# Altium PCB PCB6.PcbDoc (part 2 of 2)
Units mm, origin at the board's own origin, x right, y up, seen from the top; angles counter-clockwise.
Board outline 52.58 x 35.69 mm, 2 copper layers (Top Layer, Bottom Layer); 47 components, 153 nets, 462 pads, 249 vias.
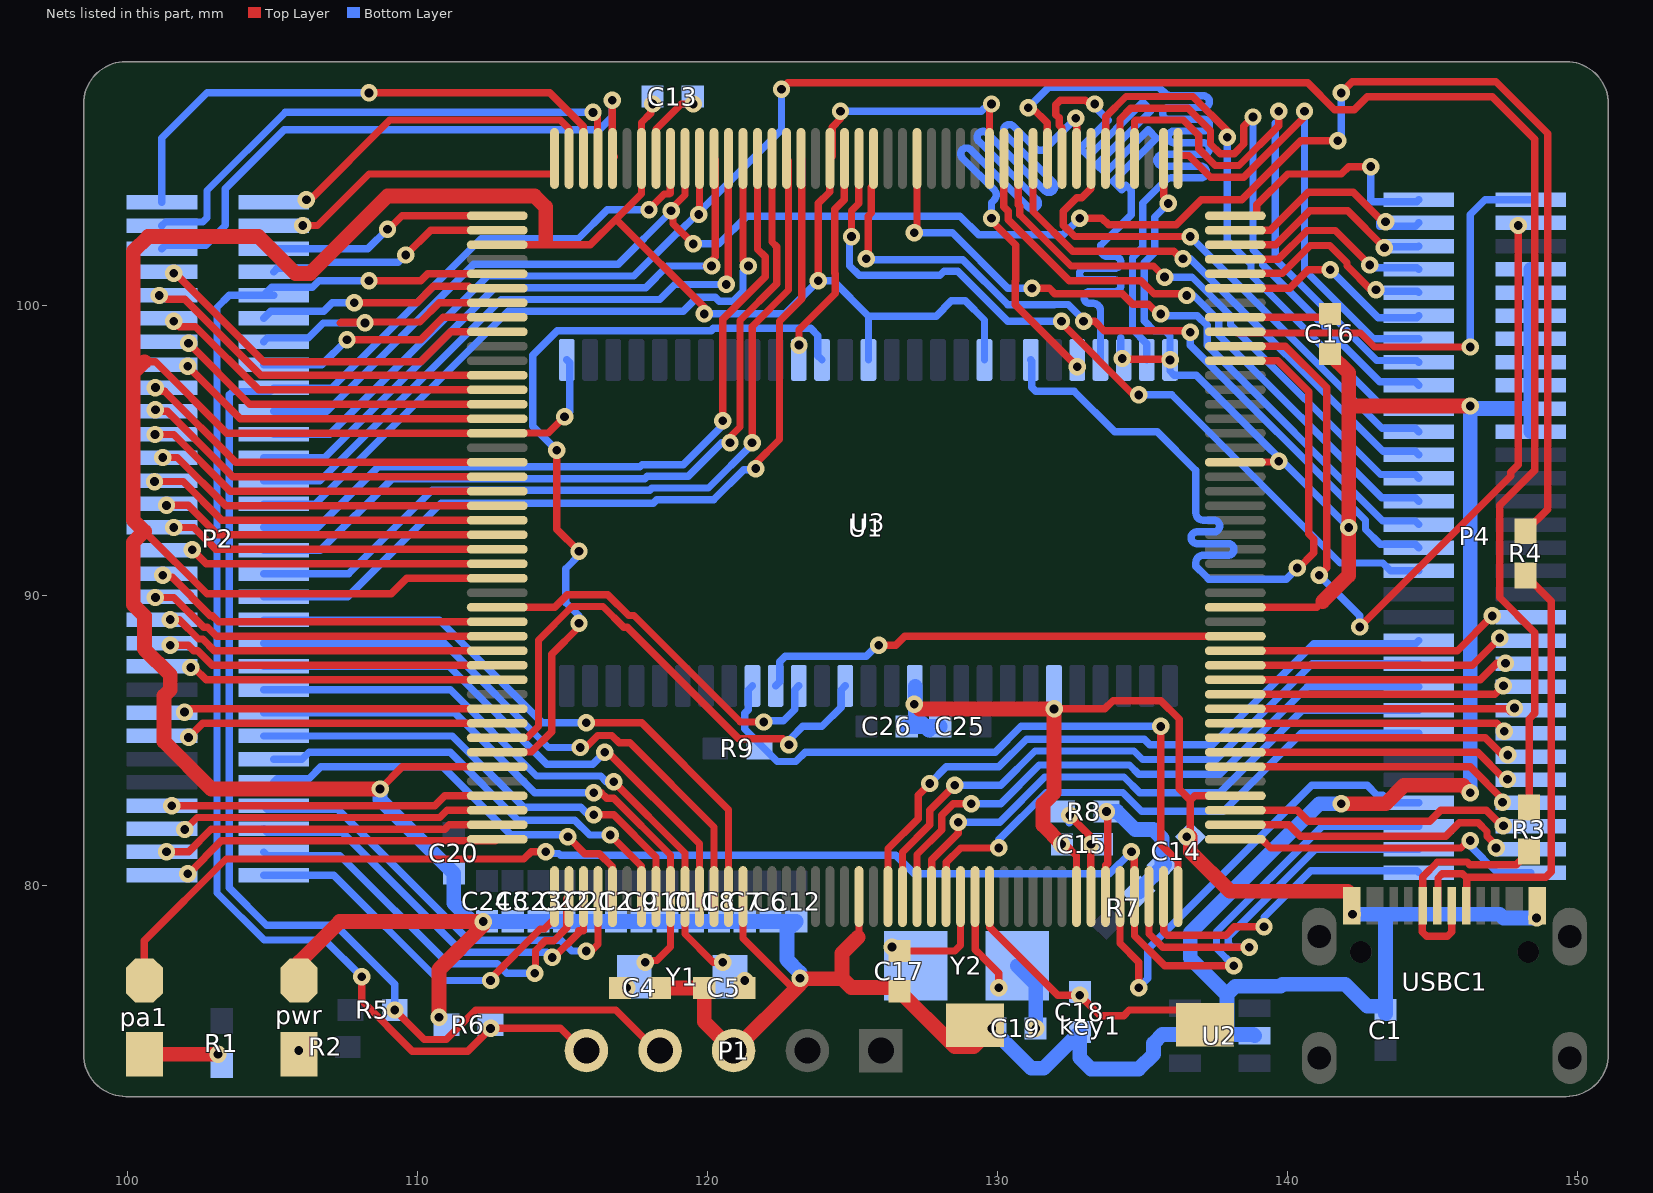
[diagram p2: the nets of this part, all layers, seen from the top]

## Via types
v1: diameter 0.6, hole 0.3, Top Layer to Bottom Layer, 249 vias

## Nets (pads, with @x,y where several pads share a name; then routed paths per layer and width w, separated by ;. In a path a pad name is that pad's centre, name@x,y a point inside that pad or via, vN(x,y) a via of type N, cw(c..) or ccw(c..) an arc to the next point about the centre after c; other vN are vias at no path point) (continued)
FMC_D12: U1.78 U3.48 | length 28.2
  Top Layer w0.254: U1.78@138.203,98.079 139.665,98.079 140.739,97.005 140.739,92.106 140.912,91.933 140.912,91.455 140.389,90.932 v1(140.335,90.932)
  Bottom Layer w0.254: U3.48@131.152,98.108 131.188,98.072 131.188,97.162 131.322,97.028 132.642,97.028 134.039,95.631 135.509,95.631 136.843,94.297 136.843,92.964 136.843,92.837 ccw(c137.096,92.837) 137.096,92.583 137.46,92.583 cw(c137.46,92.381) 137.662,92.381 cw(c137.46,92.381) 137.46,92.179 136.877,92.179 ccw(c136.877,91.977) 136.675,91.977 ccw(c136.877,91.977) 136.877,91.775 137.954,91.775 cw(c137.954,91.573) 138.156,91.573 cw(c137.954,91.573) 137.954,91.371 137.096,91.371 ccw(c137.096,91.117) 136.843,91.117 136.843,90.995 137.176,90.662 137.287,90.551 139.954,90.551 v1(140.335,90.932)
FMC_D13: U1.96 U3.50 | length 27.2
  Top Layer w0.254: v1(129.794,102.997) 129.794,102.903 130.625,102.072 130.625,100.834 130.614,100.823 130.614,100.011 v1(132.757,97.868) ; v1(132.702,106.439) 132.73,106.411 132.73,105.06 U1.96@132.726,105.056
  Bottom Layer w0.254: v1(129.794,102.997) 129.794,103.531 129.884,103.621 ccw(c129.704,103.801) 129.884,103.981 128.792,105.073 cw(c128.934,105.216) 128.792,105.358 cw(c128.934,105.216) 129.077,105.358 131.063,103.373 ccw(c131.206,103.516) 131.349,103.373 ccw(c131.206,103.516) 131.349,103.658 129.363,105.644 cw(c129.506,105.787) 129.363,105.93 cw(c129.506,105.787) 129.649,105.93 131.634,103.944 ccw(c131.777,104.087) 131.92,103.944 ccw(c131.777,104.087) 131.92,104.23 130.267,105.883 cw(c130.409,106.026) 130.267,106.169 cw(c130.409,106.026) 130.552,106.169 131.312,105.409 ccw(c131.492,105.588) 131.671,105.409 132.067,105.804 v1(132.702,106.439)
FMC_D14: U1.97 U3.51 | length 28.2
  Top Layer w0.254: U1.97@132.226,105.056 132.217,105.065 132.217,106.108 132.125,106.2 132.125,106.454 132.011,106.568 132.011,106.912 132.16,107.061 133.028,107.061 133.089,107 133.284,107 v1(133.35,106.934)
  Bottom Layer w0.254: v1(133.35,106.934) 133.35,106.928 133.35,106.84 133.818,106.372 132.855,105.409 133.141,105.123 135.008,106.991 135.294,106.705 133.426,104.838 133.712,104.552 135.2,106.04 135.486,105.755 133.998,104.266 134.283,103.981 134.432,104.13 134.612,103.95 134.612,103.77 134.612,103.116 133.552,102.056 133.552,101.929 ccw(c133.806,101.929) 133.806,101.675 134.049,101.675 cw(c134.049,101.473) 134.251,101.473 cw(c134.049,101.473) 134.049,101.271 133.03,101.271 ccw(c133.03,101.069) 132.828,101.069 ccw(c133.03,101.069) 133.03,100.867 134.049,100.867 cw(c134.049,100.665) 134.251,100.665 cw(c134.049,100.665) 134.049,100.463 133.185,100.463 ccw(c133.185,100.261) 132.983,100.261 ccw(c133.185,100.261) 133.185,100.059 133.298,100.059 cw(c133.298,99.805) 133.552,99.805 133.552,99.06 U3.51@133.552,98.108
FMC_D15: U1.98 U3.53 | length 28.2
  Top Layer w0.254: v1(131.064,106.807) 131.191,106.807 131.717,106.281 131.717,105.065 U1.98@131.726,105.056
  Bottom Layer w0.254: v1(131.064,106.807) 131.768,107.511 135.567,107.511 135.636,107.442 135.763,107.315 135.764,107.314 ccw(c136.007,107.559) 136.007,107.214 137.105,107.214 cw(c137.105,107.012) 137.307,107.012 cw(c137.105,107.012) 137.105,106.81 135.9,106.81 ccw(c135.9,106.608) 135.698,106.608 ccw(c135.9,106.608) 135.9,106.406 137.105,106.406 cw(c137.105,106.204) 137.307,106.204 cw(c137.105,106.204) 137.105,106.002 136.092,106.002 ccw(c136.092,105.8) 135.89,105.8 ccw(c136.092,105.8) 136.092,105.598 137.105,105.598 cw(c137.105,105.396) 137.307,105.396 cw(c137.105,105.396) 137.105,105.194 135.699,105.194 ccw(c135.699,104.992) 135.497,104.992 ccw(c135.699,104.992) 135.699,104.79 137.008,104.79 cw(c137.008,104.588) 137.21,104.588 cw(c137.008,104.588) 137.008,104.386 135.987,104.386 ccw(c135.987,104.132) 135.808,104.312 135.016,103.52 135.016,103.26 135.016,101.99 134.655,101.63 134.655,99.162 135.152,98.665 U3.53@135.152,98.108
FMC_NBL0: U1.169 U3.15 | length 18.9
  Top Layer w0.254: U1.169@112.749,85.079 112.758,85.088 113.79,85.088 114.173,85.471 114.173,88.446 115.331,89.604 116.4,89.604 117.115,88.889 117.232,88.889 121.076,85.045 122.6,85.045 v1(122.809,84.836)
  Bottom Layer w0.254: v1(122.809,84.836) 122.809,84.996 122.903,85.09 123.284,85.471 123.952,85.471 124.609,86.128 124.609,86.725 U3.15@124.752,86.868
FMC_NBL1: U1.170 U3.39 | length 27.8
  Top Layer w0.254: U1.170@112.749,84.579 112.758,84.588 113.925,84.588 114.626,85.289 114.626,87.956 115.57,88.9 v1(115.57,89.027) ; v1(114.808,94.996) 114.808,92.275 115.57,91.513 v1(115.57,91.511)
  Bottom Layer w0.254: v1(114.808,94.996) 113.977,95.827 113.977,98.275 114.82,99.118 120.127,99.118 120.206,99.197 123.561,99.197 123.809,98.949 123.809,98.251 U3.39@123.952,98.108 ; v1(115.57,89.027) 115.57,89.281 115.12,89.731 115.12,90.917 115.57,91.367 v1(115.57,91.511)
FMC_SDCLK: U1.112 U3.38 | length 7.1
  Top Layer w0.254: v1(123.156,98.62) 123.156,99.153 124.402,100.399 124.402,101.077 124.391,101.088 124.391,103.309 124.717,103.635 124.717,105.047 U1.112@124.726,105.056
FMC_SDNCAS: U1.160 U3.17 | length 13.3
  Top Layer w0.254: U1.160@112.749,89.579 114.735,89.579 115.164,90.008 116.567,90.008 117.282,89.293 117.466,89.293 121.137,85.622 v1(121.944,85.622)
  Bottom Layer w0.254: v1(121.944,85.622) 121.989,85.667 122.624,85.667 123.009,86.052 123.009,86.725 U3.17@123.152,86.868
FMC_SDNE0: R9.2 U1.44 U3.19 | length 23
  Top Layer w0.254: v1(135.636,85.471) 135.636,81.407 136.226,80.817 U1.44@136.226,79.602
  Bottom Layer w0.254: U3.19@121.552,86.868 121.409,86.725 121.409,86.047 121.285,85.923 121.285,85.384 122.41,84.259 123.048,84.259 123.371,84.582 129.921,84.582 130.81,85.471 v1(135.636,85.471)
FMC_SDNRAS: U1.59 U3.18 | length 17
  Top Layer w0.254: v1(125.907,88.265) 126.492,88.265 126.806,88.579 U1.59@138.203,88.579
  Bottom Layer w0.254: U3.18@122.352,86.868 122.495,87.011 122.495,87.697 122.682,87.884 125.479,87.884 125.86,88.265 v1(125.907,88.265)
GND: C1.2 C2.1 C3.1 C4.1 C5.1 C6.2 C7.2 C8.2 C9.2 C10.2 C11.2 C12.2 C13.2 C14.1 C15.2 C16.2 C17.2 C18.1 C19.2 C20.1 C21.1 C22.1 C23.1 C24.1 C25.1 C26.1 key1.1 P1.3 P4.40 P4.42 P4.44 P4.46 P4.48 P4.50 P4.52 P4.54 pwr.2 R6.1 U1.14 U1.22 U1.37 U1.48 U1.61 U1.71 U1.90 U1.102 U1.113 U1.126 U1.135 U1.148 U1.158 U1.171 U2.2 U3.6 U3.12 U3.28 U3.41 U3.46 U3.52 U3.54 USBC1.A1 USBC1.A12 USBC1.B1 USBC1.B12 | length 308.1
  Top Layer w0.254: 100.584,92.202 102.743,90.043 109.093,90.043 109.629,90.579 U1.158@112.749,90.579 ; 100.584,98.044 100.965,98.044 103.43,95.579 U1.148@112.749,95.579 112.758,95.588 114.511,95.588 v1(115.073,96.15) ; v1(108.712,83.312) 109.479,84.079 U1.171@112.749,84.079 ; U1.135@112.749,102.079 115.964,102.079 116.846,102.961 ; v1@118.044,106.944 118.044,106.614 117.726,106.296 U1.126@117.726,105.056 117.727,105.055 117.727,103.843 116.846,102.961 ; v1@118.046,106.87 v1(118.11,106.934) ; v1(119.888,99.695) 119.888,99.919 116.846,102.961 ; U1.14@121.226,79.602 121.226,78.164 122.872,76.517 v1@123.126,76.517 ; v1(123.825,100.838) 123.825,103.505 124.217,103.897 124.217,105.047 U1.113@124.226,105.056 124.299,105.129 124.299,106.133 124.587,106.421 v1(124.587,106.68) ; 125.226,78.201 U1.22@125.226,79.602 ; U1.102@129.726,105.056 129.726,106.866 v1(129.794,106.934) ; v1(131.953,86.074) 133.698,86.074 133.984,86.36 135.636,86.36 136.271,85.725 136.271,83.311 136.652,82.93 ; v1(132.207,81.407) 132.334,81.407 132.726,81.015 U1.37@132.726,79.602 ; v1(134.301,98.158) 134.327,98.133 135.927,98.133 v1(135.952,98.108) ; U1.90@135.726,105.056 135.735,105.047 135.735,103.754 135.89,103.599 v1(135.89,103.505) ; v1(136.525,81.661) 136.652,81.661 136.652,82.93 ; U1.48@138.203,83.079 136.801,83.079 136.652,82.93 ; U1.61@138.203,89.579 141.014,89.579 141.216,89.781 ; U1.71@138.203,94.579 138.212,94.588 139.673,94.588 v1(139.7,94.615)
  Top Layer w0.508: 100.584,98.044 100.203,97.663 ; pwr.2@105.918,77.089 105.918,77.343 107.315,78.74 v1(112.268,78.74) ; v1(108.712,83.312) 102.89,83.312 101.264,84.939 101.264,86.532 101.473,86.741 101.473,87.249 100.584,88.138 100.584,89.281 100.203,89.662 100.203,91.821 100.584,92.202 100.203,92.583 100.203,97.663 ; v1(110.744,75.438) 110.744,77.089 v1@112.268,78.613 ; 114.427,102.235 114.427,103.378 114.046,103.759 108.966,103.759 106.299,101.092 105.791,101.092 104.521,102.362 100.711,102.362 100.203,101.854 100.203,97.663 ; C4.1@118.364,76.454 C5.1@119.888,76.454 119.888,75.29 P1.3@120.904,74.274 ; P1.3@120.904,74.168 P1.3@120.904,74.274 ; 125.195,78.201 125.099,78.105 125.095,78.105 124.64,77.65 124.64,76.88 ; v1(127.127,86.233) 127.152,86.233 127.311,86.074 v1(131.953,86.074) 131.953,83.185 131.572,82.804 131.572,82.067 132.207,81.432 v1(132.207,81.407) ; v1(129.807,75.055) 129.173,74.422 128.535,74.422 128.385,74.572 C17.2@126.617,76.34 126.49,76.467 124.955,76.467 124.64,76.782 124.64,76.88 ; v1@136.652,81.661 136.652,81.153 138.02,79.785 142.067,79.785 142.24,79.612 142.24,79.288 v1(142.24,78.994) ; 141.216,89.781 142.113,90.678 v1(142.113,92.329) 142.113,97.659 C16.2@141.461,98.311 ; v1(141.859,82.804) 143.383,82.804 144.018,83.439 146.05,83.439 v1(146.304,83.185) ; 142.113,96.52 v1(146.304,96.52) ; P1.3@120.904,74.274 P1.3@120.904,74.295 123.126,76.517 123.29,76.681 123.375,76.766 124.526,76.766 124.64,76.88
  Bottom Layer w0.254: v1(115.073,96.15) 115.25,96.327 115.25,98.01 U3.28@115.152,98.108 ; v1(119.888,99.695) 122.682,99.695 v1(123.825,100.838) 124.333,100.838 125.552,99.619 ; v1(124.587,106.68) 129.446,106.68 129.7,106.934 v1(129.794,106.934) ; U3.41@125.552,98.108 125.552,99.619 ; U3.46@129.552,98.108 129.552,99.483 128.89,100.145 128.412,100.145 127.886,99.619 125.552,99.619 ; 134.251,98.866 134.251,98.209 v1(134.301,98.158) U3.52@134.352,98.108 ; v1(135.89,103.505) 135.42,103.035 135.42,101.823 135.059,101.462 135.059,99.456 135.41,99.105 135.791,99.105 135.952,98.944 v1(135.952,98.108) 135.952,97.725 136.095,97.582 136.86,97.582 v1(142.113,92.329)
  Bottom Layer w0.508: v1(108.712,83.312) 108.712,82.945 C20.1@111.254,80.404 111.254,79.373 111.887,78.74 v1(112.268,78.74) C9.2@117.729,78.74 C10.2@118.618,78.74 C11.2@119.507,78.74 C8.2@120.396,78.74 C7.2@121.285,78.74 C6.2@122.174,78.74 C12.2@123.063,78.74 122.74,78.417 122.74,77.432 123.19,76.982 v1(123.19,76.782) ; C26.1@126.873,85.471 127.509,85.47 ; U3.12@127.168,86.852 127.168,85.811 127.509,85.47 ; 127.635,85.344 127.509,85.47 ; C25.1@128.028,85.47 127.509,85.47 ; v1(129.807,75.055) 129.807,75.044 131.171,73.68 131.592,73.68 C18.1@132.842,74.93 132.842,74.041 133.223,73.66 134.874,73.66 135.382,74.168 135.382,74.549 135.682,74.849 138.003,74.849 ; U2.2@138.868,74.803 138.822,74.849 138.003,74.849 ; v1(141.859,82.804) 141.097,82.804 136.652,78.359 136.652,77.482 137.914,76.22 ; v1(142.24,78.994) 143.383,78.994 ; v1(146.304,83.185) v1(146.304,96.52) 146.329,96.52 146.413,96.436 148.382,96.436 P4.42@148.386,96.432 ; P4.40@148.386,95.632 P4.42@148.386,96.432 ; P4.54@148.386,101.232 P4.52@148.386,100.432 P4.50@148.386,99.632 P4.48@148.386,98.832 P4.46@148.386,98.032 P4.44@148.386,97.232 P4.42@148.386,96.432 ; v1(148.59,78.867) 147.447,78.867 147.32,78.994 143.383,78.994 ; 137.914,76.22 138.206,76.512 139.758,76.512 139.827,76.581 139.952,76.581 141.986,76.581 142.748,75.819 143.256,75.819 C1.2@143.383,75.692 143.383,75.565 143.383,78.994 ; 137.914,76.22 137.914,74.938 138.003,74.849
NetC13_1: C13.1 U1.125 | length 2.6
  Top Layer w0.254: U1.125@118.226,105.056 118.235,105.065 118.235,106.069 119.1,106.934 v1(119.507,106.934)
NetC16_1: C16.1 U1.81 | length 3.3
  Top Layer w0.254: U1.81@138.203,99.579 141.347,99.579 C16.1@141.463,99.695
NetPPS1_1: pa1.1 R1.1 | length 2.5
  Top Layer w0.508: pa1.1@100.584,74.168 v1(103.124,74.168)
NetPPS2_1: pwr.1 R2.1
  other v1: 105.906,74.295
NetR3_1: R3.1 USBC1.A7 USBC1.B7 | length 8.1
  Top Layer w0.254: USBC1.A7@145.667,79.288 145.667,78.381 145.518,78.232 144.802,78.232 144.653,78.381 144.653,79.274 USBC1.B7@144.667,79.288 144.667,80.29 145.172,80.795 146.194,80.795 146.286,80.703 147.886,80.703 R3.1@148.336,81.153
NetR4_1: R4.1 USBC1.A6 USBC1.B6 | length 16.6
  Top Layer w0.254: USBC1.A6@145.167,79.288 145.19,79.311 145.19,80.242 145.339,80.391 146.028,80.391 146.155,80.264 ; USBC1.B6@146.167,79.288 146.177,79.298 146.177,80.242 146.155,80.264 ; R4.1@148.209,90.678 149.098,89.789 149.098,80.454 148.907,80.264 146.155,80.264
OSC_IN: C17.1 U1.29 Y2.2 | length 4
  Top Layer w0.254: C17.1@126.488,77.724 128.524,77.724 128.726,77.926 U1.29@128.726,79.602
  other v1: 126.363,77.864
OSC_OUT: C19.1 U1.30 Y2.1 | length 5.9
  Top Layer w0.254: U1.30@129.226,79.602 129.235,79.593 129.235,77.775 130.048,76.962 v1(130.048,76.454)
  Bottom Layer w0.508: Y2.1@130.683,77.216 131.318,76.581 v1(131.318,75.057)
PA0: P4.7 U1.40 | length 16.8
  Top Layer w0.254: U1.40@134.226,79.602 134.226,77.991 134.874,77.343 v1(134.874,76.454)
  Bottom Layer w0.254: v1(134.874,76.454) 134.874,76.464 135.186,76.776 135.186,77.782 140.843,83.439 142.748,83.439 143.082,83.105 143.283,83.105 143.556,82.832 P4.7@144.526,82.832
PA1: P4.5 pa1.2 U1.41 | length 53.6
  Top Layer w0.254: pa1.2@100.584,77.089 100.584,78.083 103.4,80.899 113.665,80.899 113.919,81.153 v1(114.427,81.153) ; v1(134.62,81.153) 134.62,81.059 134.717,80.962 134.717,79.611 U1.41@134.726,79.602 134.726,78.253 135.763,77.216 v1(138.146,77.216)
  Bottom Layer w0.254: v1(114.427,81.153) 114.493,81.087 114.874,81.087 114.935,81.026 126.492,81.026 127.127,80.391 133.858,80.391 v1(134.62,81.153) ; v1(138.146,77.216) 137.551,77.811 137.551,78.389 141.194,82.032 P4.5@144.526,82.032
PA2: P4.3 U1.42 | length 13.8
  Top Layer w0.254: U1.42@135.226,79.602 135.226,78.325 135.7,77.851 v1(138.684,77.851)
  Bottom Layer w0.254: v1(138.684,77.851) 138.082,77.851 137.955,77.978 137.955,78.222 140.966,81.232 P4.3@144.526,81.232
PA3: P4.6 U1.47 | length 9.8
  Top Layer w0.254: U1.47@138.203,82.579 140.335,82.579 140.716,82.198 144.907,82.198 145.288,82.579 146.856,82.579 147.393,82.042 v1(147.447,82.042)
PA4: P4.8 U1.50 | length 9.7
  Top Layer w0.254: U1.50@138.203,84.079 146.299,84.079 v1@147.447,82.931
  other v1: 147.416,82.855
PA5: P4.10 U1.51 | length 9.6
  Top Layer w0.254: U1.51@138.203,84.579 146.561,84.579 v1@147.447,83.693
  other v1: 147.588,83.647
PA6: P4.12 U1.52 | length 9.5
  Top Layer w0.254: U1.52@138.203,85.079 146.823,85.079 v1@147.447,84.455
  other v1: 147.594,84.488
PA7: P4.14 U1.53 | length 9.5
  Top Layer w0.254: U1.53@138.203,85.579 147.212,85.579 v1@147.574,85.217
  other v1: 147.471,85.306
PA8: P2.27 U1.119 | length 24.4
  Top Layer w0.254: U1.119@121.226,105.056 121.226,101.532 v1(121.412,101.346)
  Bottom Layer w0.254: P2.27@104.698,93.141 P2.27@105.048,93.141 106.476,93.141 113.123,99.788 119.165,99.788 119.649,100.272 120.273,100.272 120.411,100.134 120.889,100.134 121.227,100.472 121.227,101.161 v1(121.412,101.346)
PA9: P2.25 U1.120 | length 23.1
  Top Layer w0.254: v1(120.65,100.711) 120.719,100.78 120.719,105.049 U1.120@120.726,105.056
  Bottom Layer w0.254: P2.25@104.698,93.941 106.641,93.941 112.892,100.192 118.353,100.192 118.872,100.711 v1(120.65,100.711)
PA10: P2.23 U1.121 | length 22.2
  Top Layer w0.254: v1(120.142,101.346) 119.961,101.346 120.274,101.659 120.274,105.008 U1.121@120.226,105.056
  Bottom Layer w0.254: P2.23@104.698,94.741 106.806,94.741 112.661,100.596 117.868,100.596 118.618,101.346 v1(120.142,101.346)
PA11/USB_DM: P2.21 R3.2 U1.122 | length 76.6
  Top Layer w0.254: v1(119.697,103.124) 119.726,103.152 U1.122@119.726,105.056 ; v1(122.555,107.442) 122.774,107.661 140.697,107.661 141.62,106.738 142.298,106.738 142.748,107.188 147.066,107.188 148.532,105.722 148.532,94.303 147.32,93.091 147.32,89.916 148.532,88.704 148.532,85.921 148.336,85.725 R3.2@148.336,82.677
  Bottom Layer w0.254: P2.21@105.048,95.541 106.971,95.541 112.43,101 117.456,101 118.972,102.516 ; 118.999,102.489 v1@119.634,103.124 ; v1(119.697,103.124) v1@119.634,103.124 ; v1(122.555,107.442) 122.555,106.045 v1@119.634,103.124
PA12/USB_DP: P2.19 R4.2 U1.123 | length 68.2
  Top Layer w0.254: U1.123@119.226,105.056 119.226,103.796 118.745,103.315 v1(118.745,103.251) 118.811,103.185 118.811,102.804 v1(119.507,102.108) ; v1(132.842,102.997) 133.602,102.997 133.833,102.766 136.167,102.766 137.033,103.632 138.43,103.632 140.462,105.664 v1(141.732,105.664) ; v1(141.859,107.315) 142.24,107.696 147.193,107.696 148.971,105.918 148.971,92.964 R4.2@148.209,92.202
  Bottom Layer w0.254: P2.19@105.048,96.341 106.882,96.341 111.945,101.404 116.921,101.404 118.745,103.228 v1(118.745,103.251) ; v1(119.507,102.108) 120.396,102.108 121.354,103.066 128.709,103.066 129.355,102.42 132.265,102.42 v1(132.842,102.997) ; v1(141.732,105.664) 141.859,105.791 v1(141.859,107.315)
"PA13 SWDIO": P1.4 P2.17 R5.2 U1.124 | length 54.9
  Top Layer w0.254: v1(109.22,75.692) 110.236,74.676 110.998,74.676 112.014,75.692 116.84,75.692 P1.4@118.364,74.168 ; v1(117.983,103.282) 117.983,103.305 118.506,103.828 118.687,103.828 118.717,103.858 118.717,105.047 U1.124@118.726,105.056
  Bottom Layer w0.254: v1(109.22,75.692) 109.22,76.581 107.188,78.613 104.797,78.613 103.505,79.905 103.505,96.901 103.622,97.018 104.925,97.018 P2.17@105.048,97.141 107.047,97.141 112.199,102.293 115.555,102.293 116.544,103.282 v1(117.983,103.282)
"PA14 SWCLK": P1.5 P2.9 R6.2 U1.137 | length 46.8
  Top Layer w0.254: v1(108.077,76.835) 108.077,76.019 109.824,74.272 111.737,74.272 v1(112.522,75.057) 114.935,75.057 P1.5@115.824,74.168 ; v1(108.331,100.838) 110.109,100.838 110.35,101.079 U1.137@112.749,101.079
  Bottom Layer w0.254: P2.9@105.048,100.341 P2.9@104.698,100.341 ; v1(108.077,76.835) 106.807,78.105 104.712,78.105 103.089,79.727 103.089,99.914 103.516,100.341 P2.9@104.698,100.341 ; v1(108.331,100.838) 106.607,100.838 106.383,100.614 104.971,100.614 P2.9@104.698,100.341
PA15: P2.11 U1.138 | length 8.5
  Top Layer w0.254: v1(107.823,100.076) 109.982,100.076 110.551,100.645 111.771,100.645 111.837,100.579 U1.138@112.749,100.579
  Bottom Layer w0.254: P2.11@104.698,99.541 104.944,99.787 106.772,99.787 107.061,100.076 v1(107.823,100.076)
PB0: P4.20 U1.56 | length 9.6
  Top Layer w0.254: U1.56@138.203,87.079 146.642,87.079 147.214,87.651 v1(147.518,87.651)
PB1: P4.22 U1.57 | length 9.5
  Top Layer w0.254: U1.57@138.203,87.579 146.38,87.579 v1(147.32,88.519)
PB2: P4.24 U1.58 | length 9.4
  Top Layer w0.254: U1.58@138.203,88.079 145.864,88.079 v1(147.066,89.281)
PB3: P2.34 U1.161 | length 12.2
  Top Layer w0.254: v1(101.219,90.678) 101.285,90.612 101.539,90.612 102.859,89.292 102.928,89.292 103.141,89.079 U1.161@112.749,89.079
PB4: P2.36 U1.162 | length 12.3
  Top Layer w0.254: v1(100.965,89.916) 101.6,89.916 102.628,88.888 102.761,88.888 103.07,88.579 U1.162@112.749,88.579
PB5: P2.38 U1.163 | length 11.7
  Top Layer w0.254: v1(101.473,89.154) 101.781,89.154 102.451,88.484 102.593,88.484 102.998,88.079 U1.163@112.749,88.079
PB6: P2.40 U1.164 | length 11.6
  Top Layer w0.254: v1(101.473,88.265) 102.098,88.265 102.283,88.08 102.426,88.08 102.927,87.579 U1.164@112.749,87.579
PB7: P2.42 U1.165 | length 10.7
  Top Layer w0.254: v1(102.187,87.503) 102.289,87.503 102.713,87.079 U1.165@112.749,87.079
PB8: P2.46 U1.167 | length 10.8
  Top Layer w0.254: v1(101.967,85.965) 102.081,86.079 U1.167@112.749,86.079
PB9: P2.48 U1.168 | length 10.8
  Top Layer w0.254: v1(102.108,85.09) 102.597,85.579 U1.168@112.749,85.579
PB10: P4.58 U1.79 | length 28.8
  Top Layer w0.254: U1.79@138.203,98.579 139.927,98.579 141.351,97.155 141.351,90.932 v1(141.097,90.678) ; v1(142.494,88.9) 147.701,94.107 147.701,94.234 147.955,94.488 v1(147.955,102.743)
  Bottom Layer w0.254: v1(141.097,90.678) 142.494,89.281 v1(142.494,88.9)
PB11: P4.60 U1.80 | length 15.2
  Top Layer w0.254: U1.80@138.203,99.079 138.245,99.037 142.517,99.037 143.002,98.552 v1(146.304,98.552)
  Bottom Layer w0.254: v1(146.304,98.552) 146.304,103.124 146.812,103.632 P4.60@148.386,103.632
PB12: P4.45 U1.92 | length 19.4
  Top Layer w0.254: U1.92@134.726,105.056 134.726,106.342 134.767,106.383 136.403,106.383 136.941,105.845 136.941,105.385 137.516,104.81 138.328,104.81 139.7,106.182 v1(139.7,106.68)
  Bottom Layer w0.254: 139.573,106.277 139.573,101.6 143.083,98.09 144.468,98.09 P4.45@144.526,98.032
PB13: P4.43 U1.93 | length 20.2
  Top Layer w0.254: U1.93@134.226,105.056 134.226,106.413 134.6,106.787 136.57,106.787 137.345,106.012 137.345,105.552 137.683,105.214 138.161,105.214 138.499,105.552 138.499,106.173 v1(138.811,106.485)
  Bottom Layer w0.254: v1(138.811,106.485) 138.811,101.907 139.145,101.573 139.145,101.393 143.183,97.355 144.403,97.355 P4.43@144.526,97.232
PB14: P4.41 U1.94 | length 19.4
  Top Layer w0.254: U1.94@133.726,105.056 133.735,105.065 133.735,106.493 134.433,107.191 136.738,107.191 137.922,106.007 v1(137.922,105.791)
  Bottom Layer w0.254: v1(137.922,105.791) 137.922,102.225 138.741,101.406 138.741,101.035 143.221,96.555 144.403,96.555 P4.41@144.526,96.432
PB15: P4.39 U1.95 | length 18
  Top Layer w0.254: U1.95@133.226,105.056 133.217,105.047 133.217,104.007 132.911,103.701 132.73,103.701 132.265,103.236 132.265,102.758 132.661,102.362 v1(136.652,102.362)
  Bottom Layer w0.254: v1(136.652,102.362) 143.259,95.755 144.403,95.755 P4.39@144.526,95.632
PC4: P4.16 U1.54 | length 9.5
  Top Layer w0.254: U1.54@138.203,86.079 147.601,86.079 v1@147.701,85.979
  other v1: 147.828,86.106
PC5: P4.18 U1.55 | length 9.4
  Top Layer w0.254: U1.55@138.203,86.579 147.158,86.579 v1(147.447,86.868)
PC6: P2.35 U1.115 | length 30.2
  Top Layer w0.254: v1(121.666,94.361) 121.666,94.542 122.486,95.362 122.486,99.445 123.248,100.207 123.248,105.034 U1.115@123.226,105.056
  Bottom Layer w0.254: P2.35@104.698,89.941 107.594,89.941 110.813,93.16 118.125,93.16 118.252,93.287 120.211,93.287 121.248,94.324 121.629,94.324 v1(121.666,94.361)
PC7: P2.33 U1.116 | length 29.1
  Top Layer w0.254: v1(121.539,95.25) 121.539,99.26 122.797,100.518 122.797,104.985 U1.116@122.726,105.056
  Bottom Layer w0.254: P2.33@104.698,90.741 107.632,90.741 110.502,93.611 118.005,93.611 118.085,93.691 120.034,93.691 121.539,95.196 v1(121.539,95.25)
PC8: P2.31 U1.117 | length 28.2
  Top Layer w0.254: v1(120.777,95.25) 120.777,95.45 121.123,95.796 121.123,99.469 122.393,100.739 122.393,102.006 122.226,102.173 U1.117@122.226,105.056
  Bottom Layer w0.254: P2.31@104.698,91.541 106.654,91.541 109.128,94.015 117.837,94.015 117.917,94.095 119.338,94.095 120.493,95.25 v1(120.777,95.25)
PC9: P2.29 U1.118 | length 27.2
  Top Layer w0.254: v1(120.523,96.012) 120.523,99.514 121.989,100.98 121.989,101.66 121.726,101.923 U1.118@121.726,105.056
  Bottom Layer w0.254: P2.29@104.698,92.341 106.565,92.341 108.643,94.419 117.67,94.419 117.75,94.499 119.17,94.499 120.523,95.852 v1(120.523,96.012)
PC10: P2.13 U1.139 | length 10.3
  Top Layer w0.254: v1(108.191,99.383) 107.33,99.383 107.365,99.418 110.086,99.418 110.747,100.079 U1.139@112.749,100.079
  Bottom Layer w0.254: P2.13@104.698,98.741 104.821,98.864 106.233,98.864 106.752,99.383 v1(108.191,99.383)
PC11: P2.15 U1.140 | length 8.7
  Top Layer w0.254: v1(107.569,98.806) 110.109,98.806 110.882,99.579 U1.140@112.749,99.579
  Bottom Layer w0.254: P2.15@104.698,97.941 106.704,97.941 v1(107.569,98.806)
PC12: P2.8 U1.141 | length 12.8
  Top Layer w0.254: v1(101.6,101.092) 101.654,101.092 104.702,98.044 110.109,98.044 111.144,99.079 U1.141@112.749,99.079
PC13: P2.47 U1.8 | length 16.6
  Top Layer w0.254: v1(116.078,82.423) 116.767,82.423 118.226,80.964 U1.8@118.226,79.602
  Bottom Layer w0.254: P2.47@104.698,85.141 111.201,85.141 113.665,82.677 115.629,82.677 115.817,82.489 116.012,82.489 v1(116.078,82.423)
PC14: C4.2 P2.45 U1.9 Y1.2 | length 20.3
  Top Layer w0.254: v1(116.078,83.185) 116.332,83.185 116.528,82.989 116.772,82.989 118.726,81.035 118.726,77.873 118.254,77.4 117.913,77.4 v1(117.856,77.343)
  Bottom Layer w0.254: P2.45@104.698,85.941 111.29,85.941 114.046,83.185 v1(116.078,83.185)
  other v1: 117.221,76.454
PC15: C5.2 P2.43 U1.10 Y1.1 | length 21.4
  Top Layer w0.254: v1(116.767,83.566) 119.226,81.107 U1.10@119.226,79.602 119.226,78.31 120.193,77.343 v1(120.523,77.343)
  Bottom Layer w0.254: P2.43@104.698,86.741 111.125,86.741 114.104,83.762 115.839,83.762 116.317,83.762 116.513,83.566 v1(116.767,83.566)
  other v1: 121.285,76.708
PD2: P2.10 U1.144 | length 12.5
  Top Layer w0.254: v1@101.346,100.203 101.971,100.203 104.595,97.579 U1.144@112.749,97.579
  other v1: 101.092,100.33
PD3: P2.12 U1.145 | length 12.1
  Top Layer w0.254: v1(101.6,99.441) 101.785,99.256 102.347,99.256 104.524,97.079 U1.145@112.749,97.079
PD4: P2.14 U1.146 | length 11.5
  Top Layer w0.254: v1(102.108,98.679) 104.208,96.579 U1.146@112.749,96.579
PD5: P2.16 U1.147 | length 11.4
  Top Layer w0.254: v1(102.081,97.89) 103.892,96.079 U1.147@112.749,96.079
PD6: P2.18 U1.150 | length 12.9
  Top Layer w0.254: v1(100.965,97.155) 101.059,97.155 101.192,97.022 101.287,97.022 103.729,94.579 U1.150@112.749,94.579
PD7: P2.20 U1.151 | length 12.7
  Top Layer w0.254: v1(100.965,96.393) 101.014,96.344 101.371,96.344 103.635,94.079 U1.151@112.749,94.079
PD11: P4.37 U1.99 | length 18.6
  Top Layer w0.254: U1.99@131.226,105.056 131.226,103.226 132.598,101.854 136.076,101.854 136.33,101.6 v1(136.398,101.6)
  Bottom Layer w0.254: v1(136.398,101.6) 136.652,101.6 143.297,94.955 144.403,94.955 P4.37@144.526,94.832
PD12: P4.35 U1.100 | length 19.7
  Top Layer w0.254: U1.100@130.726,105.056 130.717,105.047 130.717,103.461 130.775,103.403 130.775,103.105 132.534,101.346 135.382,101.346 v1(135.763,100.965)
  Bottom Layer w0.254: v1(135.763,100.965) 136.706,100.965 138.037,99.634 138.037,99.326 143.208,94.155 144.403,94.155 P4.35@144.526,94.032
PD13: P4.33 U1.101 | length 20.7
  Top Layer w0.254: U1.101@130.226,105.056 130.217,105.047 130.217,103.39 130.371,103.236 130.371,102.938 132.471,100.838 134.947,100.838 135.397,100.388 136.467,100.388 v1(136.525,100.33)
  Bottom Layer w0.254: v1(136.525,100.33) 136.769,100.33 137.633,99.466 137.633,98.968 143.246,93.355 144.403,93.355 P4.33@144.526,93.232
PE2: P2.59 U1.1 | length 13.2
  Top Layer w0.254: v1(112.522,76.708) 112.522,76.767 114.24,78.485 114.373,78.485 114.726,78.839 U1.1@114.726,79.602
  Bottom Layer w0.254: P2.59@104.698,80.341 107.111,80.341 110.744,76.708 v1(112.522,76.708)
PE3: P2.57 U1.2 | length 14.4
  Top Layer w0.254: v1(114.046,76.962) 114.07,76.986 114.07,77.743 114.408,78.081 114.709,78.081 115.153,78.525 115.153,79.529 U1.2@115.226,79.602
  Bottom Layer w0.254: P2.57@104.698,81.141 104.821,81.018 107.323,81.018 111.056,77.285 112.761,77.285 113.084,76.962 v1(114.046,76.962)
PE4: P2.55 U1.3 | length 14.5
  Top Layer w0.254: v1(114.647,77.505) 114.704,77.505 115.557,78.358 115.557,78.428 115.726,78.428 U1.3@115.726,79.602
  Bottom Layer w0.254: P2.55@104.698,81.941 104.821,81.818 107.412,81.818 111.541,77.689 114.462,77.689 v1(114.647,77.505)
PE5: P2.53 U1.4 | length 15.5
  Top Layer w0.254: v1@115.824,77.555 v1(115.824,77.724) ; v1@115.909,77.639 116.226,77.957 U1.4@116.226,79.602
  Bottom Layer w0.254: P2.53@104.698,82.741 104.821,82.618 107.247,82.618 111.772,78.093 114.947,78.093 115.316,77.724 v1(115.824,77.724)
PE6: P2.51 U1.5 | length 14.4
  Top Layer w0.254: v1(115.189,81.661) 115.766,81.084 116.274,81.084 116.717,80.641 116.717,79.611 U1.5@116.726,79.602
  Bottom Layer w0.254: P2.51@105.048,83.541 105.171,83.664 106.261,83.664 106.671,84.074 110.871,84.074 113.215,81.73 115.12,81.73 v1(115.189,81.661)
PF6: P4.21 U1.24 | length 23.6
  Top Layer w0.254: U1.24@126.226,79.602 126.226,81.25 127.266,82.29 127.266,83.101 v1(127.667,83.502)
  Bottom Layer w0.254: v1(127.667,83.502) 128.239,84.074 130.048,84.074 131.001,85.027 135.064,85.027 135.255,84.836 137.414,84.836 140.901,88.323 144.417,88.323 P4.21@144.526,88.432
PF7: P4.19 U1.25 | length 22.6
  Top Layer w0.254: U1.25@126.726,79.602 126.726,81.133 127.67,82.077 127.67,82.585 v1(128.524,83.439)
  Bottom Layer w0.254: v1(128.524,83.439) 130.112,83.439 131.295,84.623 134.706,84.623 135.001,84.328 137.541,84.328 140.845,87.632 P4.19@144.526,87.632
PF8: P4.17 U1.26 | length 21.7
  Top Layer w0.254: U1.26@127.226,79.602 127.226,81.052 128.074,81.9 128.074,82.408 128.47,82.804 v1(129.096,82.804)
  Bottom Layer w0.254: v1(129.096,82.804) 130.11,82.804 131.447,84.141 134.553,84.141 134.874,83.82 137.668,83.82 140.68,86.832 P4.17@144.526,86.832
PF9: P4.15 U1.27 | length 20.9
  Top Layer w0.254: U1.27@127.726,79.602 127.735,79.611 127.735,80.872 128.651,81.788 v1(128.651,82.169)
  Bottom Layer w0.254: v1(128.651,82.169) 130.077,82.169 131.635,83.727 134.364,83.727 134.906,83.185 137.668,83.185 140.515,86.032 P4.15@144.526,86.032
PF10: P4.13 U1.28 | length 20
  Top Layer w0.254: U1.28@128.226,79.602 128.235,79.611 128.235,80.781 128.734,81.28 v1(130.048,81.28)
  Bottom Layer w0.254: v1(130.048,81.28) 130.048,81.561 131.678,83.191 134.325,83.191 134.966,82.55 137.795,82.55 140.477,85.232 P4.13@144.526,85.232
PG3: P4.31 U1.107 | length 24.6
  Top Layer w0.254: v1(127.127,102.489) 127.226,102.588 U1.107@127.226,105.056 ; v1(131.191,100.584) 131.793,100.584 131.981,100.395 134.301,100.395 134.666,100.03 135.207,100.03 135.542,99.695 v1(135.636,99.695)
  Bottom Layer w0.254: v1(127.127,102.489) 128.451,102.489 130.356,100.584 v1(131.191,100.584) ; v1(135.636,99.695) 135.694,99.637 136.891,99.637 137.229,99.299 137.229,98.61 143.284,92.555 144.403,92.555 P4.31@144.526,92.432
PG6: P4.29 U1.110 | length 27.2
  Top Layer w0.254: v1(125.476,101.6) 125.545,101.669 125.545,103.066 125.653,103.174 125.653,104.071 125.726,104.144 U1.110@125.726,105.056 ; v1(132.969,99.441) 133.35,99.441 133.673,99.118 136.594,99.118 v1(136.652,99.06)
  Bottom Layer w0.254: v1(125.476,101.6) 125.511,101.565 128.803,101.565 130.361,100.007 131.957,100.007 131.968,100.018 132.446,100.018 132.969,99.495 v1(132.969,99.441) ; v1(136.652,99.06) 136.652,98.615 142.69,92.578 142.69,92.26 143.195,91.755 144.403,91.755 P4.29@144.526,91.632
PG7: P4.27 U1.111 | length 28
  Top Layer w0.254: v1(124.968,102.362) 124.968,103.251 125.217,103.5 125.217,105.047 U1.111@125.226,105.056 ; v1(132.207,99.441) 132.207,99.387 134.693,96.901 v1(134.874,96.901)
  Bottom Layer w0.254: v1(124.968,102.362) 124.899,102.293 124.899,101.361 125.237,101.023 128.02,101.023 128.158,101.161 128.636,101.161 130.356,99.441 v1(132.207,99.441) ; v1(134.874,96.901) 136.017,96.901 141.813,91.105 143.283,91.105 143.556,90.832 P4.27@144.526,90.832
PG9: P2.22 U1.152 | length 12.6
  Top Layer w0.254: v1(100.95,95.535) 101.595,95.535 103.551,93.579 U1.152@112.749,93.579
PG10: P2.24 U1.153 | length 12.2
  Top Layer w0.254: v1(101.219,94.742) 101.721,94.742 103.384,93.079 U1.153@112.749,93.079
PG11: P2.26 U1.154 | length 12.4
  Top Layer w0.254: v1(100.932,93.914) 101.92,93.914 103.255,92.579 U1.154@112.749,92.579
PG12: P2.28 U1.155 | length 11.8
  Top Layer w0.254: v1(101.346,93.091) 102.098,93.091 103.11,92.079 U1.155@112.749,92.079
PG13: P2.30 U1.156 | length 11.5
  Top Layer w0.254: v1(101.6,92.329) 102.289,92.329 103.039,91.579 U1.156@112.749,91.579
PG14: P2.32 U1.157 | length 10.7
  Top Layer w0.254: v1(102.235,91.567) 102.723,91.079 U1.157@112.749,91.079
PH2: P4.1 U1.43 | length 11.2
  Top Layer w0.254: U1.43@135.726,79.602 135.735,79.593 135.735,78.387 135.847,78.275 137.879,78.275 138.163,78.559 v1(139.192,78.559)
  Bottom Layer w0.254: v1(139.192,78.559) 139.192,78.887 140.798,80.493 144.465,80.493 P4.1@144.526,80.432
PH4: P4.2 U1.45 | length 11
  Top Layer w0.254: U1.45@138.203,81.579 139.115,81.579 139.414,81.28 145.982,81.28 146.236,81.534 v1(146.304,81.534)
  Bottom Layer w0.254: v1(146.304,81.534) 146.304,81.407 146.304,81.353 147.225,80.432 P4.2@148.386,80.432
PH5: P4.4 U1.46 | length 9.9
  Top Layer w0.254: U1.46@138.203,82.079 140.044,82.079 140.439,81.684 145.455,81.684 145.923,82.152 146.575,82.152 146.881,81.846 146.881,81.686 147.193,81.374 v1(147.193,81.28)
PH6: P4.49 U1.83 | length 7.3
  Top Layer w0.254: U1.83@138.203,100.579 140.076,100.579 140.716,101.219 v1(141.478,101.219)
  Bottom Layer w0.254: v1(141.478,101.219) 143.129,99.568 144.462,99.568 P4.49@144.526,99.632
PH7: P4.51 U1.84 | length 7.5
  Top Layer w0.254: U1.84@138.203,101.079 138.212,101.088 139.144,101.088 139.149,101.092 139.827,101.092 140.79,102.055 141.458,102.055 142.055,101.458 142.055,101.35 142.874,100.531 v1(143.055,100.531)
  Bottom Layer w0.254: v1(143.055,100.531) 143.107,100.479 144.479,100.479 P4.51@144.526,100.432
PH8: P4.53 U1.85 | length 7.3
  Top Layer w0.254: U1.85@138.203,101.579 139.688,101.579 140.678,102.569 141.652,102.569 v1(142.84,101.381)
  Bottom Layer w0.254: v1(142.84,101.381) 142.932,101.289 144.469,101.289 P4.53@144.526,101.232
PH9: P4.55 U1.86 | length 7.7
  Top Layer w0.254: U1.86@138.203,102.079 139.596,102.079 140.768,103.251 142.075,103.251 v1(143.345,101.981)
  Bottom Layer w0.254: v1(143.345,101.981) 143.179,101.981 143.179,102.006 143.345,102.006 144.501,102.006 P4.55@144.526,102.032
PH10: P4.57 U1.87 | length 7.8
  Top Layer w0.254: U1.87@138.203,102.579 139.409,102.579 140.716,103.886 142.265,103.886 v1@143.281,102.87
  Bottom Layer w0.254: v1(143.383,102.87) 143.179,102.87 143.179,102.717 143.383,102.717 144.411,102.717 P4.57@144.526,102.832
PH11: P4.59 U1.88 | length 8.4
  Top Layer w0.254: U1.88@138.203,103.079 138.925,103.079 138.946,103.1 138.946,103.461 140.006,104.521 141.859,104.521 142.113,104.775 v1(142.875,104.775)
  Bottom Layer w0.254: v1(142.875,104.775) 142.875,103.633 142.94,103.569 144.463,103.569 P4.59@144.526,103.632
PH12: P4.47 U1.89 | length 16.2
  Top Layer w0.254: U1.89@136.226,105.056 136.226,105.135 136.247,105.156 136.598,105.156 137.348,104.406 138.496,104.406 140.589,106.499 v1(140.589,106.68)
  Bottom Layer w0.254: v1(140.589,106.68) 140.589,101.219 142.976,98.832 P4.47@144.526,98.832
PH13: P2.6 U1.128 | length 20.8
  Top Layer w0.254: v1(116.713,107.061) 116.713,105.192 116.787,105.117 U1.128@116.726,105.056
  Bottom Layer w0.254: P2.6@101.188,101.941 101.311,102.064 102.699,102.064 103.378,102.743 103.378,104.013 105.41,106.045 116.271,106.045 116.713,106.487 v1(116.713,107.061)
PH14: P2.4 U1.129 | length 18.7
  Top Layer w0.254: v1(116.052,106.642) 116.21,106.484 116.21,105.072 U1.129@116.226,105.056
  Bottom Layer w0.254: P2.4@101.188,102.741 101.311,102.864 102.594,102.864 102.743,103.013 102.743,103.949 105.436,106.642 v1(116.052,106.642)
PH15: P2.2 U1.130 | length 19
  Top Layer w0.254: v1(108.331,107.315) 114.563,107.315 115.717,106.161 115.717,105.065 U1.130@115.726,105.056
  Bottom Layer w0.254: P2.2@101.188,103.541 101.188,105.76 102.743,107.315 104.962,107.315 v1(108.331,107.315)
PI0: P2.1 U1.131 | length 11.3
  Top Layer w0.254: v1(106.172,103.632) 106.299,103.632 109.05,106.383 114.924,106.383 115.226,106.081 U1.131@115.226,105.056
PI1: P2.3 U1.132 | length 9.9
  Top Layer w0.254: v1(106.045,102.743) 106.553,102.743 108.331,104.521 114.705,104.521 114.726,104.542 U1.132@114.726,105.056
PI2: P2.5 U1.133 | length 8.2
  Top Layer w0.254: v1(108.966,102.616) 109.003,102.616 109.466,103.079 U1.133@112.749,103.079
  Bottom Layer w0.254: P2.5@105.048,101.941 108.291,101.941 v1(108.966,102.616)
PI3: P2.7 U1.134 | length 8.3
  Top Layer w0.254: v1(109.601,101.727) 110.453,102.579 U1.134@112.749,102.579
  Bottom Layer w0.254: P2.7@105.048,101.141 105.171,101.264 106.344,101.264 106.553,101.473 109.347,101.473 v1(109.601,101.727)
PI4: P2.54 U1.173 | length 11.4
  Top Layer w0.254: v1(101.531,82.735) 110.602,82.735 110.946,83.079 U1.173@112.749,83.079
PI5: P2.56 U1.174 | length 11
  Top Layer w0.254: v1(101.981,81.915) 102.397,82.331 110.769,82.331 111.017,82.579 U1.174@112.749,82.579
PI6: P2.58 U1.175 | length 11.8
  Top Layer w0.254: v1(101.346,81.153) 102.108,81.153 102.882,81.927 110.937,81.927 111.089,82.079 U1.175@112.749,82.079
PI7: P2.60 U1.176 | length 11.2
  Top Layer w0.254: v1(102.076,80.391) 102.108,80.391 103.24,81.523 112.693,81.523 U1.176@112.749,81.579
PI8: P2.49 U1.7 | length 15.5
  Top Layer w0.254: v1(116.649,81.724) 117.717,80.657 117.717,79.611 U1.7@117.726,79.602
  Bottom Layer w0.254: P2.49@105.048,84.341 106.018,84.341 106.259,84.582 111.125,84.582 113.469,82.238 115.428,82.238 115.941,81.724 v1(116.649,81.724)
PI9: P2.41 U1.11 | length 19.7
  Top Layer w0.254: v1(116.459,84.582) 116.567,84.582 119.726,81.423 U1.11@119.726,79.602
  Bottom Layer w0.254: P2.41@104.698,87.541 111.087,87.541 114.462,84.166 115.672,84.166 116.043,84.166 v1(116.459,84.582)
PI10: P2.39 U1.12 | length 21.1
  Top Layer w0.254: v1(115.618,84.743) 115.804,84.743 116.22,85.159 116.698,85.159 116.956,84.901 117.329,84.901 120.226,82.004 U1.12@120.226,79.602
  Bottom Layer w0.254: P2.39@104.698,88.341 110.922,88.341 114.52,84.743 v1(115.618,84.743) 115.618,84.789 v1@115.531,84.877
PI11: P2.37 U1.13 | length 21.7
  Top Layer w0.254: v1(115.824,85.598) 117.729,85.598 120.726,82.601 U1.13@120.726,79.602
  Bottom Layer w0.254: P2.37@104.698,89.141 110.757,89.141 114.3,85.598 v1(115.824,85.598)
RST: C18.2 key1.2 U1.31 | length 9.3
  Top Layer w0.254: U1.31@129.726,79.602 129.735,79.593 129.735,78.545 132.08,76.2 v1(132.842,76.2) 133.546,75.496 134.351,75.496 134.547,75.692 key1.2@136.652,75.692
VDDA: C14.2 R7.2 R8.1 U1.39 | length 7.5
  Top Layer w0.254: U1.39@133.726,79.602 133.735,79.611 133.735,80.691 133.8,80.756 133.8,82.494 v1(133.761,82.533)
  Bottom Layer w0.508: v1(133.761,82.533) 134.129,82.533 134.696,81.966 134.747,81.915 135.377,81.915 135.674,81.617 C14.2@135.674,80.681 ; R7.2@134.874,79.756 134.874,79.818 C14.2@135.764,80.708
VREF+: C15.1 R8.2 U1.38 | length 3.4
  Top Layer w0.254: v1(132.491,82.406) 132.491,82.393 133.223,81.661 v1(133.223,81.407) 133.223,79.605 U1.38@133.226,79.602
  Bottom Layer w0.254: R8.2@132.479,82.154 132.491,82.166 v1(132.491,82.406)
pads on no net: P2.50 P2.52 P4.23 P4.25 P4.56 U1.6 U2.4 U3.40 USBC1. USBC1.0 USBC1.A5 USBC1.A8 USBC1.B5 USBC1.B8

## Silkscreen, mask and mechanical layers (free items; w line width, h text height)
Top Overlay:
  lines w0.264: 123.564,75.699 ccw(c123.571,75.699) 123.571,75.692 123.571,77.978
  text "g" at 122.047,76.454 h1.52
  text "3" at 123.952,76.073 h1.52
  text "d" at 114.808,75.946 h1.52
  text "B" at 128.016,73.66 h1.52
  text "c" at 113.157,73.406 h1.52
Mechanical 1:
  lines w0.381: 98.679,104.775 98.679,106.934 cw(c99.949,106.934) 99.949,108.204 149.606,108.204 cw(c149.606,106.934) 150.876,106.934 150.876,74.168 cw(c149.606,74.168) 149.606,72.898 99.949,72.898 cw(c99.949,74.168) 98.679,74.168 98.679,105.283